# EAGLE board slimboy (EAGLE 6.6.0)
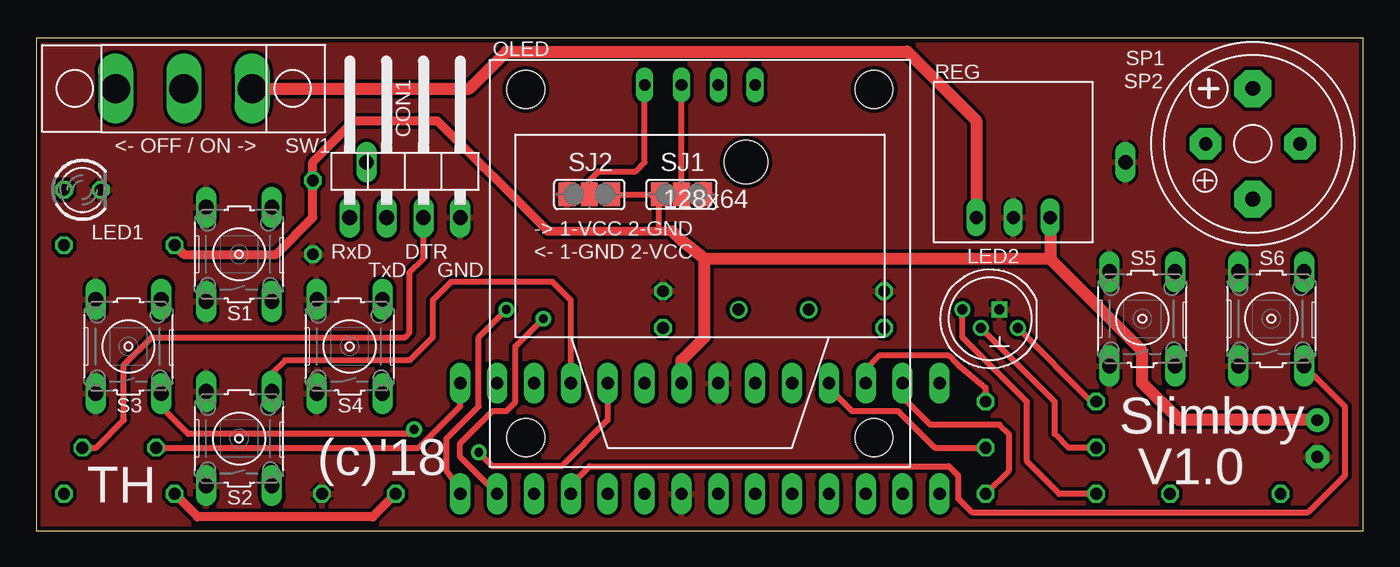
[diagram p0: board, top side]
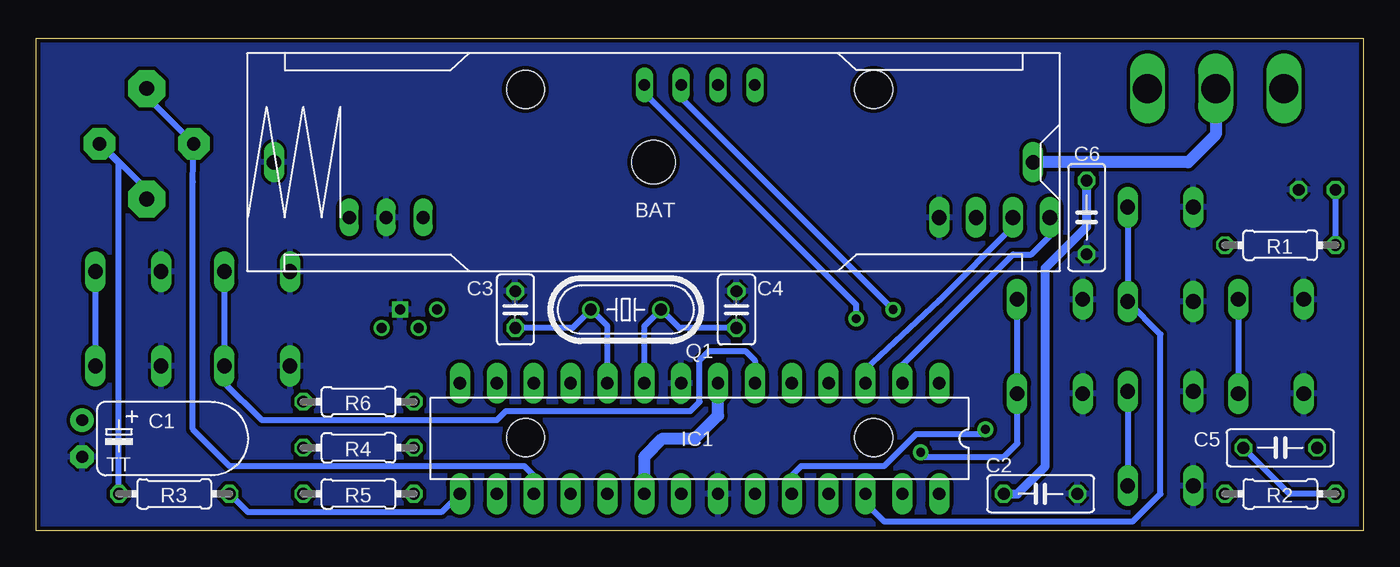
[diagram p1: board, bottom side, seen from below]

Size 91.42 x 33.96 mm. Coordinates in mm from the lower left corner, seen from the top.
Outline: 0,0 91.42,0 91.42,33.96 0,33.96 0,0
Copper layers (1*16): Top 0.035mm / dielectric 1.5mm / Bottom 0.035mm
Design rules "PCB-POOL Standard": minimum track width 0.15mm, minimum drill 0.3mm, track to track 0.15mm, track to pad 0.15mm, pad to pad 0.15mm, via to via 0.15mm, smd to smd 0.15mm, copper to edge 0.3mm, drill to drill 0.2mm, minimum pad ring 0.2mm, minimum via ring 0.15mm, stop-mask expansion 0.075mm, vias tented up to drill 0mil, thermal gap 0.2mm
Net classes: 0 default: width 0.254 mm, clearance 0.254 mm; 1 power: width 0.61 mm, drill 0.61 mm, clearance 0.254 mm; 2 gnd: width 0.305 mm, drill 0.559 mm, clearance 0.254 mm; 3 usbvcc: width 0.508 mm, drill 0.61 mm, clearance 0.254 mm; 4 aref: width 0.406 mm, drill 0.61 mm, clearance 0.254 mm

## Footprints (pad centres in the part's own frame; a part is rotated, then mirrored left to right if it is on the bottom)
1XAAP = drill 1 long: + 26.15,0; - -26.15,0 | hole 3: 0,0
TT2D5L = drill 0.813 pad 1.6: + -1.27,0 | drill 0.813 pad 1.6 octagon: - 1.27,0
C050-025X075 = drill 0.813 octagon: 1 -2.54,0; 2 2.54,0
C025-025X050 = drill 0.813 octagon: 1 -1.27,0; 2 1.27,0
1X04/90 = drill 1.016 long: 1 -3.81,-3.81; 2 -1.27,-3.81; 3 1.27,-3.81; 4 3.81,-3.81
DIL28-3 = drill 0.85 pad 1.422 long: 1 -16.51,-3.81; 2 -13.97,-3.81; 3 -11.43,-3.81; 4 -8.89,-3.81; 5 -6.35,-3.81; 6 -3.81,-3.81; 7 -1.27,-3.81; 8 1.27,-3.81; 9 3.81,-3.81; 10 6.35,-3.81; 11 8.89,-3.81; 12 11.43,-3.81; 13 13.97,-3.81; 14 16.51,-3.81; 15 16.51,3.81; 16 13.97,3.81; 17 11.43,3.81; 18 8.89,3.81; 19 6.35,3.81; 20 3.81,3.81; 21 1.27,3.81; 22 -1.27,3.81; 23 -3.81,3.81; 24 -6.35,3.81; 25 -8.89,3.81; 26 -11.43,3.81; 27 -13.97,3.81; 28 -16.51,3.81
LED3MM = drill 0.813 octagon: A -1.27,0; K 1.27,0
RGBLED = drill 0.7: B 1.905,-0.635; G -1.905,0.635; R -0.635,-0.635 | drill 0.7 square: GND 0.635,0.635
OLED_0.96_I²C = drill 0.8 long: 1 -3.81,12.3; 2 -1.27,12.3; 3 1.27,12.3; 4 3.81,12.3 | hole 2.6: -12,12; 12,12; -12,-12; 12,-12
HC49/S = drill 0.813: 1 -2.413,0; 2 2.413,0
0204/7 = drill 0.813 octagon: 1 -3.81,0; 2 3.81,0
BATREG = drill 0.9 long: GND 0,-3.81; VI -2.54,-3.81; VO 2.54,-3.81
B3F-10XX = drill 1.016 long: 1 -3.251,2.261; 2 3.251,2.261; 3 -3.251,-2.261; 4 3.251,-2.261
SJ_2 = smd 1.168 x 1.6: 1 -1.524,0; 2 0,0; 3 1.524,0
KSS1201 = drill 0.914 pad 2.159 octagon: + 3.251,0; - -3.251,0
F/CM12P = drill 1.016 pad 2.54 octagon: + 3.81,0; - -3.81,0
T215 = drill 2 long: 1 -4.7,0; 2 4.7,0; C 0,0

## Placement (x,y rotation side)
BAT  AA  [1XAAP]  48.9,25.4 0 bottom
C1  10µF  [TT2D5L]  88.27,6.35 270 bottom
C2  100nF  [C050-025X075]  22.23,2.54 180 bottom
C3  33pF  [C025-025X050]  58.42,15.24 270 bottom
C4  33pF  [C025-025X050]  43.18,15.24 270 bottom
C5  100nF  [C050-025X075]  5.71,5.71 0 bottom
C6  100nF  [C050-025X075]  19.05,21.59 90 bottom
CON1  [1X04/90]  25.4,25.4 0 top
IC1  ATMEGA328P-PU  [DIL28-3]  45.72,6.35 180 bottom
LED1  GREEN  [LED3MM]  3.17,23.5 0 top
LED2  RGBLED  [RGBLED]  65.72,14.61 0 top
OLED  OLED_0.96_I²C  [OLED_0.96_I²C]  45.72,18.41 0 top
Q1  16MHz  [HC49/S]  50.8,15.24 180 bottom
R1  330  [0204/7]  5.71,19.68 0 bottom
R2  10k  [0204/7]  5.71,2.54 180 bottom
R3  10k  [0204/7]  81.92,2.54 180 bottom
R4  150  [0204/7]  69.22,5.71 0 bottom
R5  68  [0204/7]  69.22,2.54 0 bottom
R6  68  [0204/7]  69.22,8.89 0 bottom
REG  BATREG  [BATREG]  67.31,25.4 0 top
S1  UP  [B3F-10XX]  13.97,19.05 90 top
S2  DOWN  [B3F-10XX]  13.97,6.35 90 top
S3  LEFT  [B3F-10XX]  6.35,12.7 90 top
S4  RIGHT  [B3F-10XX]  21.59,12.7 90 top
S5  A  [B3F-10XX]  76.2,14.61 90 top
S6  B  [B3F-10XX]  85.09,14.61 90 top
SJ1  [SJ_2]  44.45,23.18 0 top
SJ2  [SJ_2]  38.1,23.18 0 top
SP1  KSS1201  [KSS1201]  83.82,26.67 180 top
SP2  F/CM12P  [F/CM12P]  83.82,26.67 90 top
SW1  T215  [T215]  10.16,30.48 180 top

## Library data of the parts
BAT REG SW1 = batterie
C1 C3 C4 R1-R6 = rcl
C2 C5 C6 IC1 = SmartPrj
CON1 = pinhead
LED1 = led
LED2 OLED = bgboy_lite
Q1 = crystal; OC_FARNELL: 1667008; OC_NEWARK: unknown
S1-S6 = switch-omron; MPN: B3F-1000; OC_FARNELL: 176432; OC_NEWARK: 36M3542
SJ1 SJ2 = jumper
SP1 SP2 = buzzer; OC_FARNELL: unknown; OC_NEWARK: unknown

## Nets
+5V [usbvcc]: C1.+ C2.2 C6.2 IC1.7 IC1.20 R1.1 R2.2 REG.VO SJ1.1 SJ2.3
A0: IC1.23
A1: IC1.24 S3.3 S3.4
A2: IC1.25 S6.3 S6.4
A3: IC1.26 S1.3 S1.4
D0: CON1.1 IC1.2
D1: CON1.2 IC1.3
D2: IC1.4 S2.3 S2.4
D3: IC1.5 S4.3 S4.4
D4: IC1.6 S5.3 S5.4
D5: IC1.11 R4.2
D6: IC1.13 R5.2
D7: IC1.12 R6.2
D9: IC1.15 R3.1
D11: IC1.17 SP1.+ SP2.+
GND [gnd]: BAT.- C1.- C2.1 C3.1 C4.1 C6.1 CON1.4 IC1.8 IC1.22 LED1.K LED2.GND REG.GND S1.1 S1.2 S2.1 S2.2 S3.1 S3.2 S4.1 S4.2 S5.1 S5.2 S6.1 S6.2 SJ1.3 SJ2.1
N$1: C4.2 IC1.9 Q1.1
N$2: C3.2 IC1.10 Q1.2
N$3: LED1.A R1.2
N$4: REG.VI SW1.1
N$5: BAT.+ SW1.C
N$6: LED2.R R4.1
N$7: LED2.G R5.1
N$8: R3.2 SP1.- SP2.-
N$9: LED2.B R6.1
N$10: C5.2 CON1.3
N$11: OLED.2 SJ1.2
N$12: OLED.1 SJ2.2
RESET: C5.1 IC1.1 R2.1
SCL: IC1.28 OLED.3
SDA: IC1.27 OLED.4

## Tracks (layer width: path | path; a pad name or v marks a point on that pad's centre or on a via)
+5V
  Top 0.406: 36.58,20.7 36.51,20.64 | SJ2.3 SJ1.1 42.86,23.18 42.86,20.64
  Top 0.61: 43.81,20.64 42.86,20.64 36.51,20.64 35.24,20.64 27.62,28.26 21.91,28.26 19.05,25.4 C6.2 19.05,21.59 16.51,19.05 10.16,19.05 R1.1 | C2.2 23.18,0.95 11.11,0.95 R2.2
  Top 0.813: REG.VO 69.85,18.73 | 69.85,18.73 46.04,18.73 | C1.+ 78.74,7.62 76.2,10.16 76.2,12.38 69.85,18.73 | 43.81,20.64 44.45,20 46.04,18.73 | IC1.7 44.45,11.75 46.04,13.34 46.04,18.73
  Bottom 0.61: C2.2 23.81,2.54 21.91,4.45 21.91,18.1 19.05,20.95 C6.2
  Bottom 0.813: IC1.20 49.53,5.08 48.26,6.35 46.04,6.35 44.45,7.94 IC1.7
A1  (via drill 0.6)
  Top 0.406: v26.04,6.99 25.72,6.67 10.48,6.67 8.57,8.57 8.57,9.49 S3.3
  Bottom 0.406: S3.4 S3.3 | IC1.24 39.37,3.81 38.73,4.45 33.02,4.45 30.8,6.67 26.35,6.67 v26.04,6.99
A2
  Top 0.406: IC1.25 36.83,3.17 38.1,4.45 62.87,4.45 63.5,3.81 63.5,2.22 64.45,1.27 87.63,1.27 90.17,3.81 90.17,8.53 S6.3
  Bottom 0.406: S6.4 S6.3
A3
  Bottom 0.406: S1.4 S1.3 13.97,13.54 13.97,2.54 15.88,0.64 33.02,0.64 34.29,1.91 IC1.26
D0
  Bottom 0.406: IC1.2 31.75,11.43 24.13,19.05 22.86,19.05 21.59,20.32 CON1.1
D1
  Bottom 0.406: IC1.3 34.29,11.11 29.21,15.88 24.13,20.95 CON1.2
D2
  Top 0.406: IC1.4 36.83,15.88 35.56,17.14 28.57,17.14 27.3,15.88 27.3,13.34 25.72,11.75 17.14,11.75 16.19,10.79 16.19,9.64 S2.4
  Bottom 0.406: S2.4 S2.3
D3  (via drill 0.6)
  Top 0.406: IC1.5 39.37,7.62 36.2,4.45 31.43,4.45 v30.48,5.4
  Bottom 0.406: S4.4 S4.3 23.81,9.41 23.81,6.03 24.77,5.08 30.16,5.08 v30.48,5.4
D4
  Bottom 0.406: S5.4 S5.3 78.46,10.2 75.88,7.62 59.69,7.62 59.05,8.26 46.35,8.26 45.72,8.89 45.72,11.75 45.09,12.38 42.55,12.38 41.91,11.75 IC1.6
D5
  Top 0.406: IC1.11 54.61,9.84 56.2,8.26 59.37,8.26 61.91,5.71 R4.2
D6
  Top 0.406: R5.2 66.99,4.13 66.99,6.67 66.36,7.3 61.59,7.3 59.69,9.21 IC1.13
D7
  Top 0.406: R6.2 65.41,9.84 63.5,11.43 62.87,12.06 58.1,12.06 57.15,11.11 IC1.12
D9
  Bottom 0.406: IC1.15 63.5,1.27 76.83,1.27 R3.1
D11
  Bottom 0.406: IC1.17 57.15,3.81 57.78,4.45 78.11,4.45 80.64,6.99 80.64,24.05 SP1.+ 83.82,29.92 SP2.+
GND
  pour Top: 0,0 0,33.97 91.44,33.97 91.44,0
  pour Bottom: 0,0 0,33.97 91.44,33.97 91.44,0
N$1
  Bottom 0.406: IC1.9 49.53,14.1 Q1.1 47.12,13.97 C4.2
N$2
  Bottom 0.406: C3.2 54.48,13.97 Q1.2 52.07,14.1 IC1.10
N$3
  Bottom 0.406: R1.2 LED1.A
N$4
  Top 0.813: SW1.1 29.84,30.48 32.38,33.02 60.01,33.02 64.77,28.26 REG.VI
N$5
  Bottom 0.813: SW1.C 10.16,27.3 12.06,25.4 BAT.+
N$6
  Top 0.406: R4.1 71.12,5.71 70.17,6.67 70.17,8.89 LED2.R
N$7
  Top 0.406: R5.1 70.48,2.54 68.26,4.76 68.26,8.89 63.82,13.34 LED2.G
N$8
  Bottom 0.406: R3.2 85.72,25.32 SP1.- 87,26.67 83.82,23.5 SP2.-
N$9
  Top 0.406: R6.1 72.71,8.89 LED2.B
N$10
  Top 0.406: C5.2 4.13,5.71 6.03,7.62 6.03,11.43 7.94,13.34 25.4,13.34 25.72,13.65 25.72,17.78 26.67,18.73 CON1.3
N$11
  Top 0.406: SJ1.2 OLED.2
N$12
  Top 0.406: SJ2.2 38.1,24.13 38.73,24.77 41.27,24.77 41.91,25.4 OLED.1
RESET
  Top 0.406: C5.1 26.35,5.71 29.21,8.57 IC1.1
  Bottom 0.406: R2.1 5.08,2.54 C5.1
SCL  (via drill 0.6)
  Top 0.406: IC1.28 29.21,2.86 28.26,4.13 28.26,6.35 30.48,8.57 30.48,13.34 v32.38,15.24
  Bottom 0.406: v32.38,15.24 46.99,29.84 OLED.3
SDA  (via drill 0.6)
  Top 0.406: IC1.27 29.21,5.08 29.21,6.03 31.43,8.26 32.38,8.26 33.02,8.89 33.02,12.7 v34.92,14.61
  Bottom 0.406: v34.92,14.61 34.92,15.56 49.53,30.16 OLED.4

## Text on the board
tPlace: <- OFF / ON -> | -> 1-VCC 2-GND | RxD | DTR | <- 1-GND 2-VCC | TxD | GND | Slimboy | (c)'18 | V1.0 | TH